# EAGLE board Qwiic_keypad-Panel (EAGLE 9.2.1)
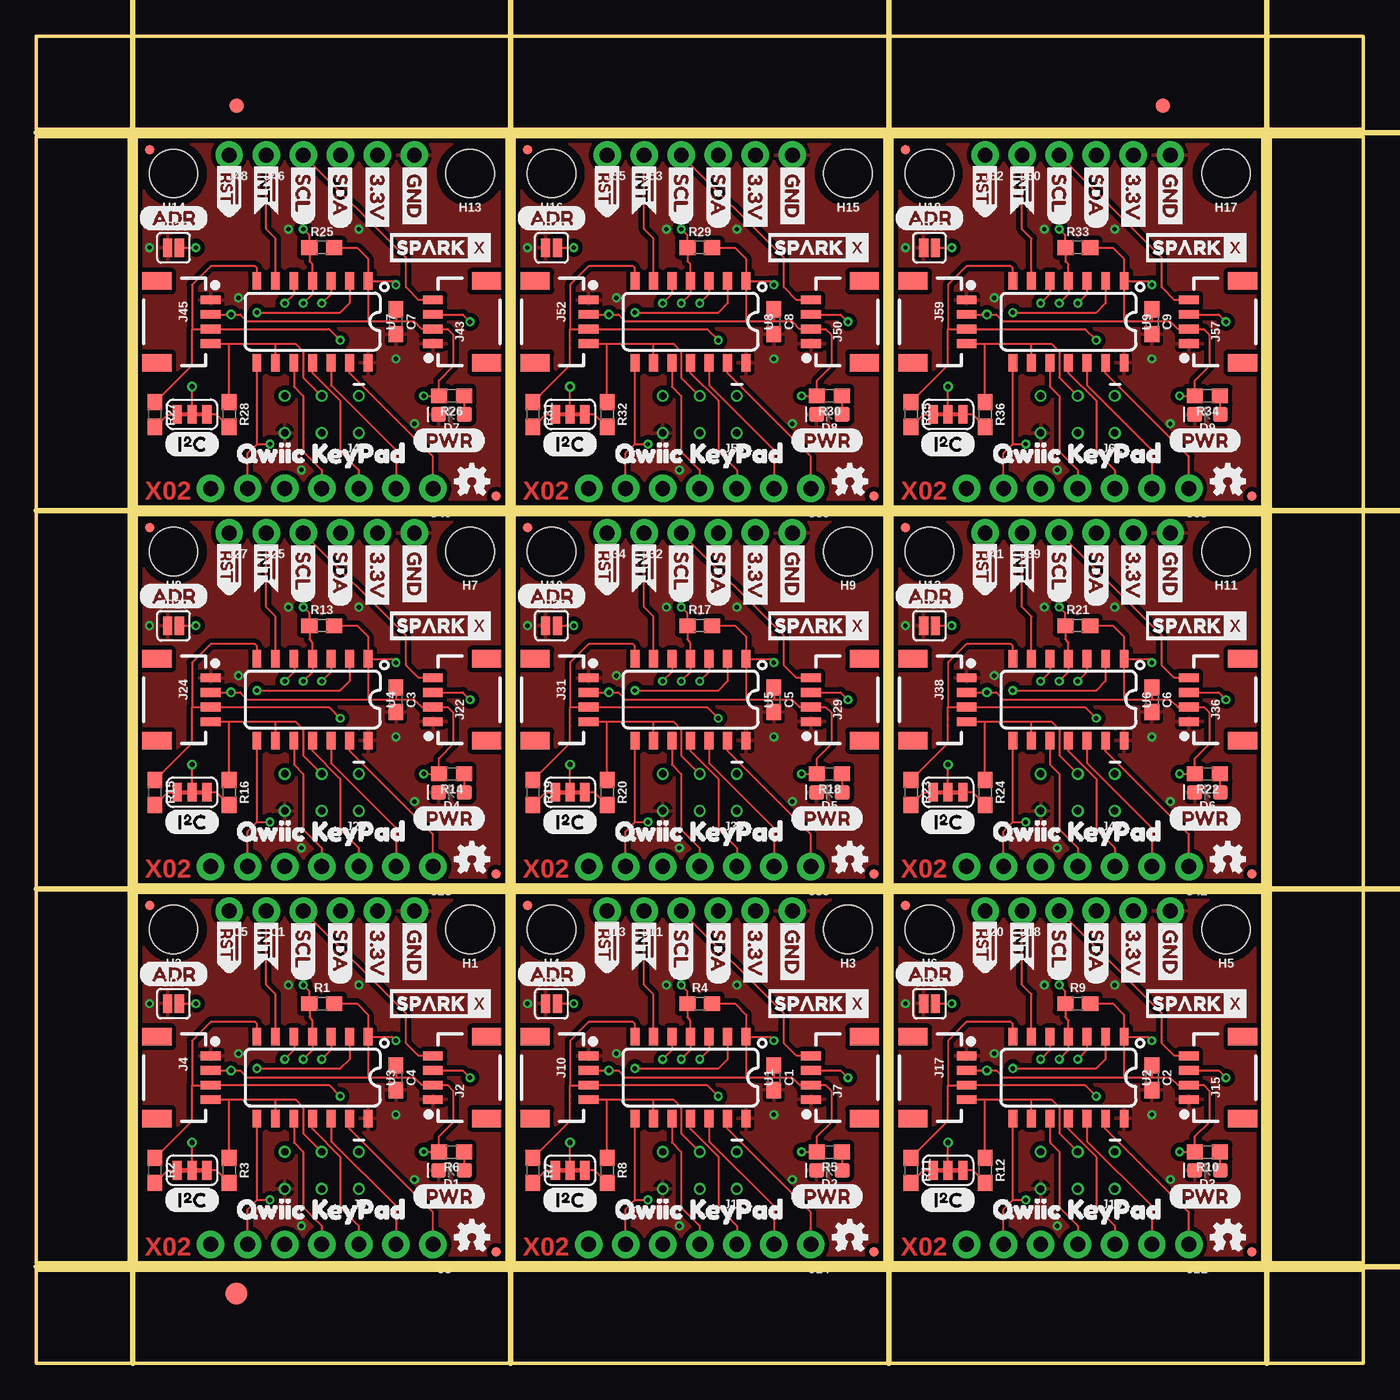
[diagram p0: board, top side]
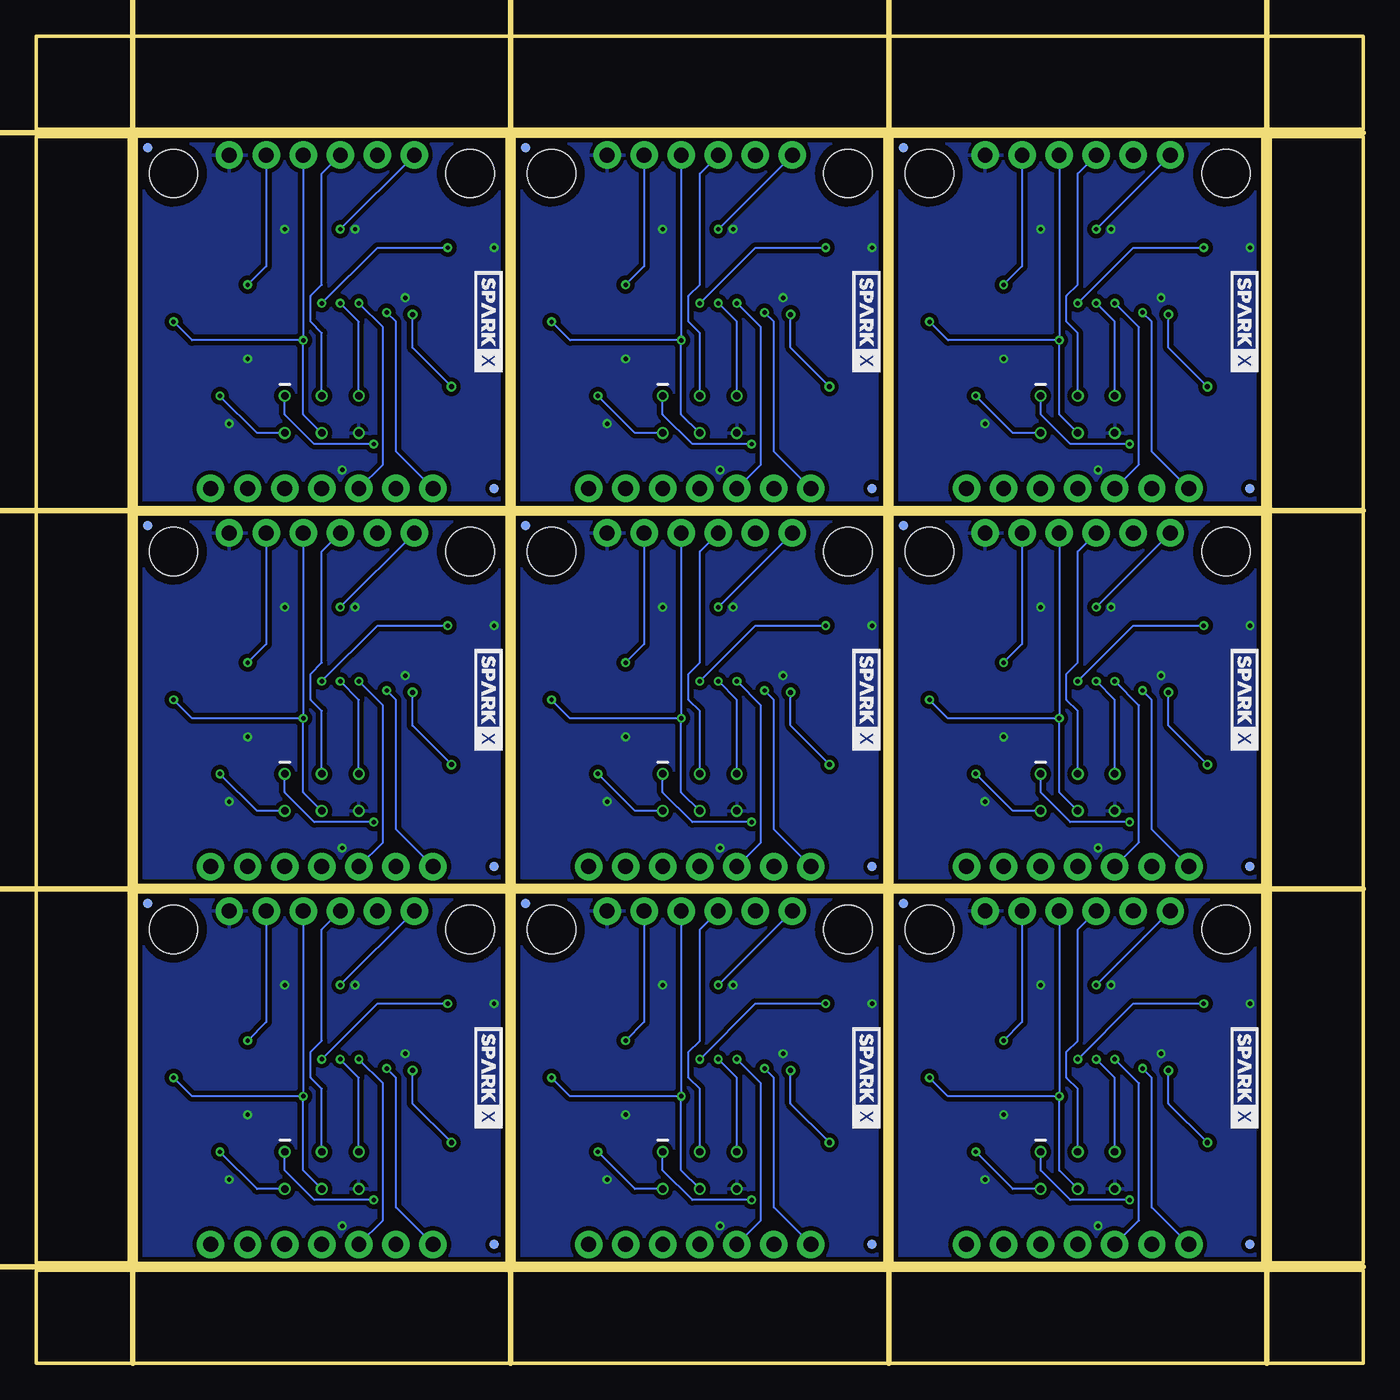
[diagram p1: board, bottom side, seen from below]

Size 90.93 x 90.93 mm. Coordinates in mm from the lower left corner, seen from the top.
Outline: 32.26,6.86 6.86,6.86 6.86,32.26 32.26,32.26 32.26,6.86
Outline: 58.17,6.86 32.77,6.86 32.77,32.26 58.17,32.26 58.17,6.86
Outline: 84.07,6.86 58.67,6.86 58.67,32.26 84.07,32.26 84.07,6.86
Outline: 32.26,32.77 6.86,32.77 6.86,58.17 32.26,58.17 32.26,32.77
Outline: 58.17,32.77 32.77,32.77 32.77,58.17 58.17,58.17 58.17,32.77
Outline: 84.07,32.77 58.67,32.77 58.67,58.17 84.07,58.17 84.07,32.77
Outline: 32.26,58.67 6.86,58.67 6.86,84.07 32.26,84.07 32.26,58.67
Outline: 58.17,58.67 32.77,58.67 32.77,84.07 58.17,84.07 58.17,58.67
Outline: 84.07,58.67 58.67,58.67 58.67,84.07 84.07,84.07 84.07,58.67
Outline: 0,6.35 90.93,6.35 90.93,0 0,0 0,6.35
Outline: 84.58,84.07 90.93,84.07 90.93,6.86 84.58,6.86 84.58,84.07
Outline: 0,90.93 90.93,90.93 90.93,84.58 0,84.58 0,90.93
Outline: 0,84.07 6.35,84.07 6.35,6.86 0,6.86 0,84.07
Copper layers (1*16): Top 0.035mm / dielectric 1.5mm / Bottom 0.035mm
Design rules "SparkFun-2-layer-PCBWay-LIMIT": minimum track width 6mil, minimum drill 0.3mm, track to track 6mil, track to pad 6mil, pad to pad 6mil, via to via 6mil, smd to smd 6mil, copper to edge 6mil, drill to drill 6mil, minimum pad ring 6mil, minimum via ring 6mil, stop-mask expansion 4mil, vias tented up to drill 25mil, thermal gap 10mil
Milling: 8 lines

## Footprints (pad centres in the part's own frame; a part is rotated, then mirrored left to right if it is on the bottom)
0603 = smd 1.1 x 1: 1 -0.85,0; 2 0.85,0
LED-0603 = smd 1 x 1: A -0.877,0; C 0.877,0
FIDUCIAL-1X2 = smd 1 x 1: 1 0,0
FIDUCIAL-1.5X3 = smd 1.5 x 1.5: 1 0,0
STAND-OFF = hole 3.302: 0,0
1X01_NO_SILK = drill 1.016 pad 1.88: 1 0,0
1X04_1MM_RA = smd 0.6 x 1.35: 1 -1.5,0; 2 -0.5,0; 3 0.5,0; 4 1.5,0 | smd 1.2 x 2: NC1 2.8,-3.675; NC2 -2.8,-3.675
1X04_NO_SILK = drill 1.016 pad 1.88: 1 0,0; 2 2.54,0; 3 5.08,0; 4 7.62,0
2X3_TEST_POINTS = drill 0.508: 1 -2.54,-1.27; 2 -2.54,1.27; 3 0,-1.27; 4 0,1.27; 5 2.54,-1.27; 6 2.54,1.27
1X07_NO_SILK = drill 1.016 pad 1.88: 1 0,0; 2 2.54,0; 3 5.08,0; 4 7.62,0; 5 10.16,0; 6 12.7,0; 7 15.24,0
MICRO-FIDUCIAL = smd 0.635 x 0.635: 1 0,0
SMT-JUMPER_2_NO_SILK = smd 0.635 x 1.27: 1 -0.406,0; 2 0.406,0
SMT-JUMPER_3_2-NC_TRACE_SILK = smd 0.635 x 1.27: 1 -1.016,0; 2 0,0; 3 1.016,0
SO14 = smd 0.6 x 1.2: 1 -3.175,-2.8; 2 -1.905,-2.8; 3 -0.635,-2.8; 4 0.635,-2.8; 5 1.905,-2.8; 6 3.175,-2.8; 7 4.445,-2.8; 8 4.445,2.8; 9 3.175,2.8; 10 1.905,2.8; 11 0.635,2.8; 12 -0.635,2.8; 13 -1.905,2.8; 14 -3.175,2.8

## Placement (x,y rotation side)
C1  0.1uF  [0603]  50.55,19.56 270 top
C2  0.1uF  [0603]  76.45,19.56 270 top
C3  0.1uF  [0603]  24.64,45.47 270 top
C4  0.1uF  [0603]  24.64,19.56 270 top
C5  0.1uF  [0603]  50.55,45.47 270 top
C6  0.1uF  [0603]  76.45,45.47 270 top
C7  0.1uF  [0603]  24.64,71.37 270 top
C8  0.1uF  [0603]  50.55,71.37 270 top
C9  0.1uF  [0603]  76.45,71.37 270 top
D1  RED  [LED-0603]  28.45,13.21 180 top
D2  RED  [LED-0603]  54.36,13.21 180 top
D3  RED  [LED-0603]  80.26,13.21 180 top
D4  RED  [LED-0603]  28.45,39.12 180 top
D5  RED  [LED-0603]  54.36,39.12 180 top
D6  RED  [LED-0603]  80.26,39.12 180 top
D7  RED  [LED-0603]  28.45,65.02 180 top
D8  RED  [LED-0603]  54.36,65.02 180 top
D9  RED  [LED-0603]  80.26,65.02 180 top
E$1  [FIDUCIAL-1X2]  13.72,86.17 0 top
E$2  [FIDUCIAL-1X2]  77.22,86.17 0 top
E$3  [FIDUCIAL-1.5X3]  13.72,4.76 0 top
H1  STAND-OFF  [STAND-OFF]  29.72,29.72 180 top
H2  STAND-OFF  [STAND-OFF]  9.4,29.72 180 top
H3  STAND-OFF  [STAND-OFF]  55.63,29.72 180 top
H4  STAND-OFF  [STAND-OFF]  35.31,29.72 180 top
H5  STAND-OFF  [STAND-OFF]  81.53,29.72 180 top
H6  STAND-OFF  [STAND-OFF]  61.21,29.72 180 top
H7  STAND-OFF  [STAND-OFF]  29.72,55.63 180 top
H8  STAND-OFF  [STAND-OFF]  9.4,55.63 180 top
H9  STAND-OFF  [STAND-OFF]  55.63,55.63 180 top
H10  STAND-OFF  [STAND-OFF]  35.31,55.63 180 top
H11  STAND-OFF  [STAND-OFF]  81.53,55.63 180 top
H12  STAND-OFF  [STAND-OFF]  61.21,55.63 180 top
H13  STAND-OFF  [STAND-OFF]  29.72,81.53 180 top
H14  STAND-OFF  [STAND-OFF]  9.4,81.53 180 top
H15  STAND-OFF  [STAND-OFF]  55.63,81.53 180 top
H16  STAND-OFF  [STAND-OFF]  35.31,81.53 180 top
H17  STAND-OFF  [STAND-OFF]  81.53,81.53 180 top
H18  STAND-OFF  [STAND-OFF]  61.21,81.53 180 top
J1  [1X01_NO_SILK]  15.75,30.99 180 top
J2  [1X04_1MM_RA]  27.18,19.56 90 top
J3  PTH  [1X04_NO_SILK]  25.91,30.99 180 top
J4  [1X04_1MM_RA]  11.94,19.56 270 top
J5  [1X01_NO_SILK]  13.21,30.99 180 top
J6  AVR_SPI_PROG_3X2TESTPOINTS  [2X3_TEST_POINTS]  19.56,13.21 180 top
J7  [1X04_1MM_RA]  53.09,19.56 90 top
J8  [1X07_NO_SILK]  27.18,8.13 180 top
J9  PTH  [1X04_NO_SILK]  51.82,30.99 180 top
J10  [1X04_1MM_RA]  37.85,19.56 270 top
J11  [1X01_NO_SILK]  41.66,30.99 180 top
J12  AVR_SPI_PROG_3X2TESTPOINTS  [2X3_TEST_POINTS]  45.47,13.21 180 top
J13  [1X01_NO_SILK]  39.12,30.99 180 top
J14  [1X07_NO_SILK]  53.09,8.13 180 top
J15  [1X04_1MM_RA]  78.99,19.56 90 top
J16  PTH  [1X04_NO_SILK]  77.72,30.99 180 top
J17  [1X04_1MM_RA]  63.75,19.56 270 top
J18  [1X01_NO_SILK]  67.56,30.99 180 top
J19  AVR_SPI_PROG_3X2TESTPOINTS  [2X3_TEST_POINTS]  71.37,13.21 180 top
J20  [1X01_NO_SILK]  65.02,30.99 180 top
J21  [1X07_NO_SILK]  78.99,8.13 180 top
J22  [1X04_1MM_RA]  27.18,45.47 90 top
J23  PTH  [1X04_NO_SILK]  25.91,56.9 180 top
J24  [1X04_1MM_RA]  11.94,45.47 270 top
J25  [1X01_NO_SILK]  15.75,56.9 180 top
J26  AVR_SPI_PROG_3X2TESTPOINTS  [2X3_TEST_POINTS]  19.56,39.12 180 top
J27  [1X01_NO_SILK]  13.21,56.9 180 top
J28  [1X07_NO_SILK]  27.18,34.04 180 top
J29  [1X04_1MM_RA]  53.09,45.47 90 top
J30  PTH  [1X04_NO_SILK]  51.82,56.9 180 top
J31  [1X04_1MM_RA]  37.85,45.47 270 top
J32  [1X01_NO_SILK]  41.66,56.9 180 top
J33  AVR_SPI_PROG_3X2TESTPOINTS  [2X3_TEST_POINTS]  45.47,39.12 180 top
J34  [1X01_NO_SILK]  39.12,56.9 180 top
J35  [1X07_NO_SILK]  53.09,34.04 180 top
J36  [1X04_1MM_RA]  78.99,45.47 90 top
J37  PTH  [1X04_NO_SILK]  77.72,56.9 180 top
J38  [1X04_1MM_RA]  63.75,45.47 270 top
J39  [1X01_NO_SILK]  67.56,56.9 180 top
J40  AVR_SPI_PROG_3X2TESTPOINTS  [2X3_TEST_POINTS]  71.37,39.12 180 top
J41  [1X01_NO_SILK]  65.02,56.9 180 top
J42  [1X07_NO_SILK]  78.99,34.04 180 top
J43  [1X04_1MM_RA]  27.18,71.37 90 top
J44  PTH  [1X04_NO_SILK]  25.91,82.8 180 top
J45  [1X04_1MM_RA]  11.94,71.37 270 top
J46  [1X01_NO_SILK]  15.75,82.8 180 top
J47  AVR_SPI_PROG_3X2TESTPOINTS  [2X3_TEST_POINTS]  19.56,65.02 180 top
J48  [1X01_NO_SILK]  13.21,82.8 180 top
J49  [1X07_NO_SILK]  27.18,59.94 180 top
J50  [1X04_1MM_RA]  53.09,71.37 90 top
J51  PTH  [1X04_NO_SILK]  51.82,82.8 180 top
J52  [1X04_1MM_RA]  37.85,71.37 270 top
J53  [1X01_NO_SILK]  41.66,82.8 180 top
J54  AVR_SPI_PROG_3X2TESTPOINTS  [2X3_TEST_POINTS]  45.47,65.02 180 top
J55  [1X01_NO_SILK]  39.12,82.8 180 top
J56  [1X07_NO_SILK]  53.09,59.94 180 top
J57  [1X04_1MM_RA]  78.99,71.37 90 top
J58  PTH  [1X04_NO_SILK]  77.72,82.8 180 top
J59  [1X04_1MM_RA]  63.75,71.37 270 top
J60  [1X01_NO_SILK]  67.56,82.8 180 top
J61  AVR_SPI_PROG_3X2TESTPOINTS  [2X3_TEST_POINTS]  71.37,65.02 180 top
J62  [1X01_NO_SILK]  65.02,82.8 180 top
J63  [1X07_NO_SILK]  78.99,59.94 180 top
JP1  FIDUCIALUFIDUCIAL  [MICRO-FIDUCIAL]  7.75,8.13 180 bottom
JP2  FIDUCIALUFIDUCIAL  [MICRO-FIDUCIAL]  7.75,31.37 180 top
JP3  FIDUCIALUFIDUCIAL  [MICRO-FIDUCIAL]  31.5,31.5 180 bottom
JP4  [SMT-JUMPER_2_NO_SILK]  9.4,24.64 0 top
JP5  FIDUCIALUFIDUCIAL  [MICRO-FIDUCIAL]  33.66,31.37 180 top
JP6  FIDUCIALUFIDUCIAL  [MICRO-FIDUCIAL]  31.5,7.62 180 top
JP7  FIDUCIALUFIDUCIAL  [MICRO-FIDUCIAL]  57.4,7.62 180 top
JP8  FIDUCIALUFIDUCIAL  [MICRO-FIDUCIAL]  33.66,8.13 180 bottom
JP9  FIDUCIALUFIDUCIAL  [MICRO-FIDUCIAL]  57.4,31.5 180 bottom
JP10  [SMT-JUMPER_2_NO_SILK]  35.31,24.64 0 top
JP11  FIDUCIALUFIDUCIAL  [MICRO-FIDUCIAL]  59.56,31.37 180 top
JP12  FIDUCIALUFIDUCIAL  [MICRO-FIDUCIAL]  83.31,7.62 180 top
JP13  FIDUCIALUFIDUCIAL  [MICRO-FIDUCIAL]  59.56,8.13 180 bottom
JP14  FIDUCIALUFIDUCIAL  [MICRO-FIDUCIAL]  83.31,31.5 180 bottom
JP15  [SMT-JUMPER_2_NO_SILK]  61.21,24.64 0 top
JP16  FIDUCIALUFIDUCIAL  [MICRO-FIDUCIAL]  7.75,57.28 180 top
JP17  FIDUCIALUFIDUCIAL  [MICRO-FIDUCIAL]  31.5,33.53 180 top
JP18  FIDUCIALUFIDUCIAL  [MICRO-FIDUCIAL]  7.75,34.04 180 bottom
JP19  FIDUCIALUFIDUCIAL  [MICRO-FIDUCIAL]  31.5,57.4 180 bottom
JP20  [SMT-JUMPER_2_NO_SILK]  9.4,50.55 0 top
JP21  FIDUCIALUFIDUCIAL  [MICRO-FIDUCIAL]  33.66,57.28 180 top
JP22  FIDUCIALUFIDUCIAL  [MICRO-FIDUCIAL]  57.4,33.53 180 top
JP23  FIDUCIALUFIDUCIAL  [MICRO-FIDUCIAL]  33.66,34.04 180 bottom
JP24  FIDUCIALUFIDUCIAL  [MICRO-FIDUCIAL]  57.4,57.4 180 bottom
JP25  [SMT-JUMPER_2_NO_SILK]  35.31,50.55 0 top
JP26  FIDUCIALUFIDUCIAL  [MICRO-FIDUCIAL]  59.56,57.28 180 top
JP27  FIDUCIALUFIDUCIAL  [MICRO-FIDUCIAL]  83.31,33.53 180 top
JP28  FIDUCIALUFIDUCIAL  [MICRO-FIDUCIAL]  59.56,34.04 180 bottom
JP29  FIDUCIALUFIDUCIAL  [MICRO-FIDUCIAL]  83.31,57.4 180 bottom
JP30  [SMT-JUMPER_2_NO_SILK]  61.21,50.55 0 top
JP31  FIDUCIALUFIDUCIAL  [MICRO-FIDUCIAL]  7.75,83.19 180 top
JP32  FIDUCIALUFIDUCIAL  [MICRO-FIDUCIAL]  31.5,59.44 180 top
JP33  FIDUCIALUFIDUCIAL  [MICRO-FIDUCIAL]  7.75,59.94 180 bottom
JP34  FIDUCIALUFIDUCIAL  [MICRO-FIDUCIAL]  31.5,83.31 180 bottom
JP35  [SMT-JUMPER_2_NO_SILK]  9.4,76.45 0 top
JP36  FIDUCIALUFIDUCIAL  [MICRO-FIDUCIAL]  33.66,83.19 180 top
JP37  FIDUCIALUFIDUCIAL  [MICRO-FIDUCIAL]  57.4,59.44 180 top
JP38  FIDUCIALUFIDUCIAL  [MICRO-FIDUCIAL]  33.66,59.94 180 bottom
JP39  FIDUCIALUFIDUCIAL  [MICRO-FIDUCIAL]  57.4,83.31 180 bottom
JP40  [SMT-JUMPER_2_NO_SILK]  35.31,76.45 0 top
JP41  FIDUCIALUFIDUCIAL  [MICRO-FIDUCIAL]  59.56,83.19 180 top
JP42  FIDUCIALUFIDUCIAL  [MICRO-FIDUCIAL]  83.31,59.44 180 top
JP43  FIDUCIALUFIDUCIAL  [MICRO-FIDUCIAL]  59.56,59.94 180 bottom
JP44  FIDUCIALUFIDUCIAL  [MICRO-FIDUCIAL]  83.31,83.31 180 bottom
JP45  [SMT-JUMPER_2_NO_SILK]  61.21,76.45 0 top
LOGO1  OSHW-LOGOMINI  [OSHW-LOGO-MINI]  29.84,8.64 0 top
LOGO2  OSHW-LOGOMINI  [OSHW-LOGO-MINI]  55.75,8.64 0 top
LOGO3  OSHW-LOGOMINI  [OSHW-LOGO-MINI]  81.66,8.64 0 top
LOGO4  OSHW-LOGOMINI  [OSHW-LOGO-MINI]  29.84,34.54 0 top
LOGO5  OSHW-LOGOMINI  [OSHW-LOGO-MINI]  55.75,34.54 0 top
LOGO6  OSHW-LOGOMINI  [OSHW-LOGO-MINI]  81.66,34.54 0 top
LOGO7  OSHW-LOGOMINI  [OSHW-LOGO-MINI]  29.84,60.45 0 top
LOGO8  OSHW-LOGOMINI  [OSHW-LOGO-MINI]  55.75,60.45 0 top
LOGO9  OSHW-LOGOMINI  [OSHW-LOGO-MINI]  81.66,60.45 0 top
R1  4.7k  [0603]  19.56,24.64 0 top
R2  2.2k  [0603]  8.13,13.21 270 top
R3  2.2k  [0603]  13.21,13.21 270 top
R4  4.7k  [0603]  45.47,24.64 0 top
R5  1k  [0603]  54.36,14.48 180 top
R6  1k  [0603]  28.45,14.48 180 top
R7  2.2k  [0603]  34.04,13.21 270 top
R8  2.2k  [0603]  39.12,13.21 270 top
R9  4.7k  [0603]  71.37,24.64 0 top
R10  1k  [0603]  80.26,14.48 180 top
R11  2.2k  [0603]  59.94,13.21 270 top
R12  2.2k  [0603]  65.02,13.21 270 top
R13  4.7k  [0603]  19.56,50.55 0 top
R14  1k  [0603]  28.45,40.39 180 top
R15  2.2k  [0603]  8.13,39.12 270 top
R16  2.2k  [0603]  13.21,39.12 270 top
R17  4.7k  [0603]  45.47,50.55 0 top
R18  1k  [0603]  54.36,40.39 180 top
R19  2.2k  [0603]  34.04,39.12 270 top
R20  2.2k  [0603]  39.12,39.12 270 top
R21  4.7k  [0603]  71.37,50.55 0 top
R22  1k  [0603]  80.26,40.39 180 top
R23  2.2k  [0603]  59.94,39.12 270 top
R24  2.2k  [0603]  65.02,39.12 270 top
R25  4.7k  [0603]  19.56,76.45 0 top
R26  1k  [0603]  28.45,66.29 180 top
R27  2.2k  [0603]  8.13,65.02 270 top
R28  2.2k  [0603]  13.21,65.02 270 top
R29  4.7k  [0603]  45.47,76.45 0 top
R30  1k  [0603]  54.36,66.29 180 top
R31  2.2k  [0603]  34.04,65.02 270 top
R32  2.2k  [0603]  39.12,65.02 270 top
R33  4.7k  [0603]  71.37,76.45 0 top
R34  1k  [0603]  80.26,66.29 180 top
R35  2.2k  [0603]  59.94,65.02 270 top
R36  2.2k  [0603]  65.02,65.02 270 top
SJ1  [SMT-JUMPER_3_2-NC_TRACE_SILK]  36.58,13.21 180 top
SJ2  [SMT-JUMPER_3_2-NC_TRACE_SILK]  62.48,13.21 180 top
SJ3  [SMT-JUMPER_3_2-NC_TRACE_SILK]  10.67,39.12 180 top
SJ4  [SMT-JUMPER_3_2-NC_TRACE_SILK]  36.58,39.12 180 top
SJ5  [SMT-JUMPER_3_2-NC_TRACE_SILK]  10.67,13.21 180 top
SJ6  [SMT-JUMPER_3_2-NC_TRACE_SILK]  62.48,39.12 180 top
SJ7  [SMT-JUMPER_3_2-NC_TRACE_SILK]  10.67,65.02 180 top
SJ8  [SMT-JUMPER_3_2-NC_TRACE_SILK]  36.58,65.02 180 top
SJ9  [SMT-JUMPER_3_2-NC_TRACE_SILK]  62.48,65.02 180 top
U1  ATTINY84  [SO14]  45.47,19.56 180 top
U2  ATTINY84  [SO14]  71.37,19.56 180 top
U3  ATTINY84  [SO14]  19.56,19.56 180 top
U4  ATTINY84  [SO14]  19.56,45.47 180 top
U5  ATTINY84  [SO14]  45.47,45.47 180 top
U6  ATTINY84  [SO14]  71.37,45.47 180 top
U7  ATTINY84  [SO14]  19.56,71.37 180 top
U8  ATTINY84  [SO14]  45.47,71.37 180 top
U9  ATTINY84  [SO14]  71.37,71.37 180 top
U$1  SPARKX-LOGO3  [SPARKX-SMALL]  8.13,19.56 270 bottom
U$2  SPARKX-LOGO3  [SPARKX-SMALL]  27.69,24.64 0 top
U$3  [3.3V]  23.37,30.61 270 top
U$4  [GND]  25.91,30.61 270 top
U$5  [SDA]  20.83,30.61 270 top
U$6  [SCL]  18.29,30.61 270 top
U$7  SPARKX-LOGO3  [SPARKX-SMALL]  53.59,24.64 0 top
U$8  [(PWR)]  25.78,11.43 0 top
U$9  [(I_SUPER2_C)]  8.76,11.18 0 top
U$10  [(ADR)]  6.98,26.67 0 top
U$11  [#RST>]  13.21,30.86 270 top
U$12  [#INT1]  15.75,30.86 270 top
U$13  SPARKX-LOGO3  [SPARKX-SMALL]  34.04,19.56 270 bottom
U$14  [3.3V]  49.28,30.61 270 top
U$15  [QWIIC_KEYPAD0]  12.57,10.54 0 top
U$16  [GND]  51.82,30.61 270 top
U$17  [SDA]  46.74,30.61 270 top
U$18  [SCL]  44.2,30.61 270 top
U$19  [(PWR)]  51.69,11.43 0 top
U$20  [(I_SUPER2_C)]  34.67,11.18 0 top
U$21  [(ADR)]  32.89,26.67 0 top
U$22  [#RST>]  39.12,30.86 270 top
U$23  [QWIIC_KEYPAD0]  38.48,10.54 0 top
U$24  [#INT1]  41.66,30.86 270 top
U$25  SPARKX-LOGO3  [SPARKX-SMALL]  79.5,24.64 0 top
U$26  SPARKX-LOGO3  [SPARKX-SMALL]  59.94,19.56 270 bottom
U$27  [3.3V]  75.18,30.61 270 top
U$28  [GND]  77.72,30.61 270 top
U$29  [SDA]  72.64,30.61 270 top
U$30  [SCL]  70.1,30.61 270 top
U$31  [(PWR)]  77.6,11.43 0 top
U$32  [(I_SUPER2_C)]  60.58,11.18 0 top
U$33  [(ADR)]  58.8,26.67 0 top
U$34  [#RST>]  65.02,30.86 270 top
U$35  [QWIIC_KEYPAD0]  64.39,10.54 0 top
U$36  [#INT1]  67.56,30.86 270 top
U$37  SPARKX-LOGO3  [SPARKX-SMALL]  27.69,50.55 0 top
U$38  SPARKX-LOGO3  [SPARKX-SMALL]  8.13,45.47 270 bottom
U$39  [3.3V]  23.37,56.51 270 top
U$40  [GND]  25.91,56.51 270 top
U$41  [SDA]  20.83,56.51 270 top
U$42  [SCL]  18.29,56.51 270 top
U$43  [(PWR)]  25.78,37.34 0 top
U$44  [(I_SUPER2_C)]  8.76,37.08 0 top
U$45  [(ADR)]  6.98,52.58 0 top
U$46  [#RST>]  13.21,56.77 270 top
U$47  [QWIIC_KEYPAD0]  12.57,36.45 0 top
U$48  [#INT1]  15.75,56.77 270 top
U$49  SPARKX-LOGO3  [SPARKX-SMALL]  53.59,50.55 0 top
U$50  SPARKX-LOGO3  [SPARKX-SMALL]  34.04,45.47 270 bottom
U$51  [3.3V]  49.28,56.51 270 top
U$52  [GND]  51.82,56.51 270 top
U$53  [SDA]  46.74,56.51 270 top
U$54  [SCL]  44.2,56.51 270 top
U$55  [(PWR)]  51.69,37.34 0 top
U$56  [(I_SUPER2_C)]  34.67,37.08 0 top
U$57  [(ADR)]  32.89,52.58 0 top
U$58  [#RST>]  39.12,56.77 270 top
U$59  [QWIIC_KEYPAD0]  38.48,36.45 0 top
U$60  [#INT1]  41.66,56.77 270 top
U$61  SPARKX-LOGO3  [SPARKX-SMALL]  79.5,50.55 0 top
U$62  SPARKX-LOGO3  [SPARKX-SMALL]  59.94,45.47 270 bottom
U$63  [3.3V]  75.18,56.51 270 top
U$64  [GND]  77.72,56.51 270 top
U$65  [SDA]  72.64,56.51 270 top
U$66  [SCL]  70.1,56.51 270 top
U$67  [(PWR)]  77.6,37.34 0 top
U$68  [(I_SUPER2_C)]  60.58,37.08 0 top
U$69  [(ADR)]  58.8,52.58 0 top
U$70  [#RST>]  65.02,56.77 270 top
U$71  [QWIIC_KEYPAD0]  64.39,36.45 0 top
U$72  [#INT1]  67.56,56.77 270 top
U$73  SPARKX-LOGO3  [SPARKX-SMALL]  27.69,76.45 0 top
U$74  SPARKX-LOGO3  [SPARKX-SMALL]  8.13,71.37 270 bottom
U$75  [3.3V]  23.37,82.42 270 top
U$76  [GND]  25.91,82.42 270 top
U$77  [SDA]  20.83,82.42 270 top
U$78  [SCL]  18.29,82.42 270 top
U$79  [(PWR)]  25.78,63.25 0 top
U$80  [(I_SUPER2_C)]  8.76,62.99 0 top
U$81  [(ADR)]  6.98,78.49 0 top
U$82  [#RST>]  13.21,82.68 270 top
U$83  [QWIIC_KEYPAD0]  12.57,62.36 0 top
U$84  [#INT1]  15.75,82.68 270 top
U$85  SPARKX-LOGO3  [SPARKX-SMALL]  53.59,76.45 0 top
U$86  SPARKX-LOGO3  [SPARKX-SMALL]  34.04,71.37 270 bottom
U$87  [3.3V]  49.28,82.42 270 top
U$88  [GND]  51.82,82.42 270 top
U$89  [SDA]  46.74,82.42 270 top
U$90  [SCL]  44.2,82.42 270 top
U$91  [(PWR)]  51.69,63.25 0 top
U$92  [(I_SUPER2_C)]  34.67,62.99 0 top
U$93  [(ADR)]  32.89,78.49 0 top
U$94  [#RST>]  39.12,82.68 270 top
U$95  [QWIIC_KEYPAD0]  38.48,62.36 0 top
U$96  [#INT1]  41.66,82.68 270 top
U$97  SPARKX-LOGO3  [SPARKX-SMALL]  79.5,76.45 0 top
U$98  SPARKX-LOGO3  [SPARKX-SMALL]  59.94,71.37 270 bottom
U$99  [3.3V]  75.18,82.42 270 top
U$100  [GND]  77.72,82.42 270 top
U$101  [SDA]  72.64,82.42 270 top
U$102  [SCL]  70.1,82.42 270 top
U$103  [(PWR)]  77.6,63.25 0 top
U$104  [(I_SUPER2_C)]  60.58,62.99 0 top
U$105  [(ADR)]  58.8,78.49 0 top
U$106  [#RST>]  65.02,82.68 270 top
U$107  [QWIIC_KEYPAD0]  64.39,62.36 0 top
U$108  [#INT1]  67.56,82.68 270 top

## Library data of the parts
C1-C9 = SparkFun-Capacitors; PROD_ID: CAP-00810
D1-D9 = SparkFun-LED; PROD_ID: DIO-00819
E$1 E$2 LOGO1-LOGO9 = SparkFun-Aesthetics
E$3 = SparkFun-Retired
H1-H18 = SparkFun-Hardware
J1 J5 J6 J8 J11-J14 J18-J21 J25-J28 J32-J35 J39-J42 J46-J49 J53-J56 J60-J63 = SparkFun-Connectors
J2 J4 J7 J10 J15 J17 J22 J24 J29 J31 J36 J38 J43 J45 J50 J52 J57 J59 = SparkFun-Connectors; PROD_ID: CONN-13694
J3 J9 J16 J23 J30 J37 J44 J51 J58 U$1 U$2 U$7 U$13 U$25 U$26 U$37 U$38 U$49 U$50 U$61 U$62 U$73 U$74 U$85 U$86 U$97 U$98 = SparkX
JP1-JP3 JP5-JP9 JP11-JP14 JP16-JP19 JP21-JP24 JP26-JP29 JP31-JP34 JP36-JP39 JP41-JP44 = SparkFun
JP4 JP10 JP15 JP20 JP25 JP30 JP35 JP40 JP45 SJ1-SJ9 = SparkFun-Jumpers
R1 R4 R9 R13 R17 R21 R25 R29 R33 = SparkFun-Resistors; PROD_ID: RES-07857
R2 R3 R7 R8 R11 R12 R15 R16 R19 R20 R23 R24 R27 R28 R31 R32 R35 R36 = SparkFun-Resistors; PROD_ID: RES-08272
R5 R6 R10 R14 R18 R22 R26 R30 R34 = SparkFun-Resistors; PROD_ID: RES-07856
U1-U9 = SparkFun-IC-Microcontroller; PROD_ID: IC-11285
U$3-U$6 U$8-U$11 U$14 U$16-U$22 U$27-U$34 U$39-U$46 U$51-U$58 U$63-U$70 U$75-U$82 U$87-U$94 U$99-U$106 = Labels-0_04
U$12 U$24 U$36 U$48 U$60 U$72 U$84 U$96 U$108 = buzzard_labels (12)
U$15 U$23 U$35 U$47 U$59 U$71 U$83 U$95 U$107 = buzzard_labels (10)

## Nets
1: J8.1 U3.13
2: J8.2 U3.12
3: J8.3 U3.11
3.3V: C4.1 J2.2 J3.2 J4.2 J6.2 R1.2 R6.2 SJ5.2 U3.1
3.3V1: C1.1 J7.2 J9.2 J10.2 J12.2 R4.2 R5.2 SJ1.2 U1.1
3.3V2: C2.1 J15.2 J16.2 J17.2 J19.2 R9.2 R10.2 SJ2.2 U2.1
3.3V3: C3.1 J22.2 J23.2 J24.2 J26.2 R13.2 R14.2 SJ3.2 U4.1
3.3V4: C5.1 J29.2 J30.2 J31.2 J33.2 R17.2 R18.2 SJ4.2 U5.1
3.3V5: C6.1 J36.2 J37.2 J38.2 J40.2 R21.2 R22.2 SJ6.2 U6.1
3.3V6: C7.1 J43.2 J44.2 J45.2 J47.2 R25.2 R26.2 SJ7.2 U7.1
3.3V7: C8.1 J50.2 J51.2 J52.2 J54.2 R29.2 R30.2 SJ8.2 U8.1
3.3V8: C9.1 J57.2 J58.2 J59.2 J61.2 R33.2 R34.2 SJ9.2 U9.1
4: J8.4 U3.10
5: J8.5 U3.5
6: J14.4 U1.10
7: J8.7 U3.2
8: J14.3 U1.11
9: J14.2 U1.12
10: J14.1 U1.13
11: J14.7 U1.2
12: J14.5 U1.5
13: J21.4 U2.10
14: J21.3 U2.11
15: J21.2 U2.12
16: J21.1 U2.13
17: J21.7 U2.2
18: J21.5 U2.5
19: J28.4 U4.10
20: J28.3 U4.11
21: J28.2 U4.12
22: J28.1 U4.13
23: J28.7 U4.2
24: J28.5 U4.5
25: J35.4 U5.10
26: J35.3 U5.11
27: J35.2 U5.12
28: J35.1 U5.13
29: J35.7 U5.2
30: J35.5 U5.5
31: J42.4 U6.10
32: J42.3 U6.11
33: J42.2 U6.12
34: J42.1 U6.13
35: J42.7 U6.2
36: J42.5 U6.5
37: J49.4 U7.10
38: J49.3 U7.11
39: J49.2 U7.12
40: J49.1 U7.13
41: J49.7 U7.2
42: J49.5 U7.5
43: J56.4 U8.10
44: J56.3 U8.11
45: J56.2 U8.12
46: J56.1 U8.13
47: J56.7 U8.2
48: J56.5 U8.5
49: J63.4 U9.10
50: J63.3 U9.11
51: J63.2 U9.12
52: J63.1 U9.13
53: J63.7 U9.2
54: J63.5 U9.5
!INT: J1.1 U3.6
!INT1: J11.1 U1.6
!INT2: J18.1 U2.6
!INT3: J25.1 U4.6
!INT4: J32.1 U5.6
!INT5: J39.1 U6.6
!INT6: J46.1 U7.6
!INT7: J53.1 U8.6
!INT8: J60.1 U9.6
!RST: J5.1 J6.5 R1.1 U3.4
!RST1: J12.5 J13.1 R4.1 U1.4
!RST2: J19.5 J20.1 R9.1 U2.4
!RST3: J26.5 J27.1 R13.1 U4.4
!RST4: J33.5 J34.1 R17.1 U5.4
!RST5: J40.5 J41.1 R21.1 U6.4
!RST6: J47.5 J48.1 R25.1 U7.4
!RST7: J54.5 J55.1 R29.1 U8.4
!RST8: J61.5 J62.1 R33.1 U9.4
ADD1: JP4.2 U3.3
ADD2: JP10.2 U1.3
ADD3: JP15.2 U2.3
ADD4: JP20.2 U4.3
ADD5: JP25.2 U5.3
ADD6: JP30.2 U6.3
ADD7: JP35.2 U7.3
ADD8: JP40.2 U8.3
ADD9: JP45.2 U9.3
GND: C4.2 D1.C J2.1 J3.1 J4.1 J6.6 JP4.1 U3.14
GND1: C1.2 D2.C J7.1 J9.1 J10.1 J12.6 JP10.1 U1.14
GND2: C2.2 D3.C J15.1 J16.1 J17.1 J19.6 JP15.1 U2.14
GND3: C3.2 D4.C J22.1 J23.1 J24.1 J26.6 JP20.1 U4.14
GND4: C5.2 D5.C J29.1 J30.1 J31.1 J33.6 JP25.1 U5.14
GND5: C6.2 D6.C J36.1 J37.1 J38.1 J40.6 JP30.1 U6.14
GND6: C7.2 D7.C J43.1 J44.1 J45.1 J47.6 JP35.1 U7.14
GND7: C8.2 D8.C J50.1 J51.1 J52.1 J54.6 JP40.1 U8.14
GND8: C9.2 D9.C J57.1 J58.1 J59.1 J61.6 JP45.1 U9.14
MISO/1: J12.1 J14.6 U1.8
MISO/2: J19.1 J21.6 U2.8
MISO/3: J26.1 J28.6 U4.8
MISO/4: J33.1 J35.6 U5.8
MISO/5: J40.1 J42.6 U6.8
MISO/6: J6.1 J8.6 U3.8
MISO/7: J47.1 J49.6 U7.8
MISO/8: J54.1 J56.6 U8.8
MISO/9: J61.1 J63.6 U9.8
N$1: D1.A R6.1
N$2: R2.2 SJ5.3
N$3: R3.2 SJ5.1
N$4: D2.A R5.1
N$5: R7.2 SJ1.3
N$6: R8.2 SJ1.1
N$7: D3.A R10.1
N$8: R11.2 SJ2.3
N$9: R12.2 SJ2.1
N$10: D4.A R14.1
N$11: R15.2 SJ3.3
N$12: R16.2 SJ3.1
N$13: D5.A R18.1
N$14: R19.2 SJ4.3
N$15: R20.2 SJ4.1
N$16: D6.A R22.1
N$17: R23.2 SJ6.3
N$18: R24.2 SJ6.1
N$19: D7.A R26.1
N$20: R27.2 SJ7.3
N$21: R28.2 SJ7.1
N$22: D8.A R30.1
N$23: R31.2 SJ8.3
N$24: R32.2 SJ8.1
N$25: D9.A R34.1
N$26: R35.2 SJ9.3
N$27: R36.2 SJ9.1
SCL: J2.4 J3.4 J4.4 J6.3 R3.1 U3.9
SCL1: J7.4 J9.4 J10.4 J12.3 R8.1 U1.9
SCL2: J15.4 J16.4 J17.4 J19.3 R12.1 U2.9
SCL3: J22.4 J23.4 J24.4 J26.3 R16.1 U4.9
SCL4: J29.4 J30.4 J31.4 J33.3 R20.1 U5.9
SCL5: J36.4 J37.4 J38.4 J40.3 R24.1 U6.9
SCL6: J43.4 J44.4 J45.4 J47.3 R28.1 U7.9
SCL7: J50.4 J51.4 J52.4 J54.3 R32.1 U8.9
SCL8: J57.4 J58.4 J59.4 J61.3 R36.1 U9.9
SDA: J2.3 J3.3 J4.3 J6.4 R2.1 U3.7
SDA1: J7.3 J9.3 J10.3 J12.4 R7.1 U1.7
SDA2: J15.3 J16.3 J17.3 J19.4 R11.1 U2.7
SDA3: J22.3 J23.3 J24.3 J26.4 R15.1 U4.7
SDA4: J29.3 J30.3 J31.3 J33.4 R19.1 U5.7
SDA5: J36.3 J37.3 J38.3 J40.4 R23.1 U6.7
SDA6: J43.3 J44.3 J45.3 J47.4 R27.1 U7.7
SDA7: J50.3 J51.3 J52.3 J54.4 R31.1 U8.7
SDA8: J57.3 J58.3 J59.3 J61.4 R35.1 U9.7

## Tracks (layer width: path | path; a pad name or v marks a point on that pad's centre or on a via)
1
  Top 0.152: U3.13 21.46,16.05 27.18,10.33 J8.1
2
  Top 0.152: U3.12 20.19,15.21 24.64,10.76 J8.2
3
  Top 0.152: J8.3 22.1,9.4 20.83,10.67 20.83,14.14 18.92,16.05 U3.11
3.3V  (via drill 0.3, 0.35)
  Top 0.152: 24.64,19.56 25.91,19.56 26.41,19.06 J2.2 28.19,19.06 28.57,18.67 28.57,16.51 27.6,15.53 R6.2 v26.54,14.48 | 24.64,19.56 22.73,19.56 | 22.73,19.56 14.48,19.56 13.98,20.06 v13.34,20.06 J4.2 | C4.1 24.64,19.56 | U3.1 22.73,19.56 | R1.2 21.97,24.64 22.73,23.88 U3.1 | U3.1 24.38,22.36 v24.64,22.1 | SJ5.2 v10.67,15.11
  Bottom 0.152: J6.2 24,11.94 v26.54,14.48 | J3.2 23.37,23.37 v24.64,22.1 | v10.67,15.11 13.34,17.78 v13.34,20.06
3.3V1  (via drill 0.3, 0.35)
  Top 0.152: 50.55,19.56 51.82,19.56 52.32,19.06 J7.2 54.09,19.06 54.48,18.67 54.48,16.51 53.51,15.53 R5.2 v52.45,14.48 | 50.55,19.56 48.64,19.56 | 48.64,19.56 40.39,19.56 39.89,20.06 v39.24,20.06 J10.2 | C1.1 50.55,19.56 | U1.1 48.64,19.56 | R4.2 47.88,24.64 48.64,23.88 U1.1 | U1.1 50.29,22.36 v50.55,22.1 | SJ1.2 v36.58,15.11
  Bottom 0.152: J12.2 49.91,11.94 v52.45,14.48 | J9.2 49.28,23.37 v50.55,22.1 | v36.58,15.11 39.24,17.78 v39.24,20.06
3.3V2  (via drill 0.3, 0.35)
  Top 0.152: 76.45,19.56 77.72,19.56 78.22,19.06 J15.2 80,19.06 80.39,18.67 80.39,16.51 79.41,15.53 R10.2 v78.36,14.48 | 76.45,19.56 74.55,19.56 | 74.55,19.56 66.29,19.56 65.79,20.06 v65.15,20.06 J17.2 | C2.1 76.45,19.56 | U2.1 74.55,19.56 | R9.2 73.79,24.64 74.55,23.88 U2.1 | U2.1 76.19,22.36 v76.45,22.1 | SJ2.2 v62.48,15.11
  Bottom 0.152: J19.2 75.82,11.94 v78.36,14.48 | J16.2 75.18,23.37 v76.45,22.1 | v62.48,15.11 65.15,17.78 v65.15,20.06
3.3V3  (via drill 0.3, 0.35)
  Top 0.152: 24.64,45.47 25.91,45.47 26.41,44.97 J22.2 28.19,44.97 28.57,44.58 28.57,42.42 27.6,41.44 R14.2 v26.54,40.39 | 24.64,45.47 22.73,45.47 | 22.73,45.47 14.48,45.47 13.98,45.97 v13.34,45.97 J24.2 | C3.1 24.64,45.47 | U4.1 22.73,45.47 | R13.2 21.97,50.55 22.73,49.78 U4.1 | U4.1 24.38,48.27 v24.64,48.01 | SJ3.2 v10.67,41.02
  Bottom 0.152: J26.2 24,37.85 v26.54,40.39 | J23.2 23.37,49.28 v24.64,48.01 | v10.67,41.02 13.34,43.69 v13.34,45.97
3.3V4  (via drill 0.3, 0.35)
  Top 0.152: 50.55,45.47 51.82,45.47 52.32,44.97 J29.2 54.09,44.97 54.48,44.58 54.48,42.42 53.51,41.44 R18.2 v52.45,40.39 | 50.55,45.47 48.64,45.47 | 48.64,45.47 40.39,45.47 39.89,45.97 v39.24,45.97 J31.2 | C5.1 50.55,45.47 | U5.1 48.64,45.47 | R17.2 47.88,50.55 48.64,49.78 U5.1 | U5.1 50.29,48.27 v50.55,48.01 | SJ4.2 v36.58,41.02
  Bottom 0.152: J33.2 49.91,37.85 v52.45,40.39 | J30.2 49.28,49.28 v50.55,48.01 | v36.58,41.02 39.24,43.69 v39.24,45.97
3.3V5  (via drill 0.3, 0.35)
  Top 0.152: 76.45,45.47 77.72,45.47 78.22,44.97 J36.2 80,44.97 80.39,44.58 80.39,42.42 79.41,41.44 R22.2 v78.36,40.39 | 76.45,45.47 74.55,45.47 | 74.55,45.47 66.29,45.47 65.79,45.97 v65.15,45.97 J38.2 | C6.1 76.45,45.47 | U6.1 74.55,45.47 | R21.2 73.79,50.55 74.55,49.78 U6.1 | U6.1 76.19,48.27 v76.45,48.01 | SJ6.2 v62.48,41.02
  Bottom 0.152: J40.2 75.82,37.85 v78.36,40.39 | J37.2 75.18,49.28 v76.45,48.01 | v62.48,41.02 65.15,43.69 v65.15,45.97
3.3V6  (via drill 0.3, 0.35)
  Top 0.152: 24.64,71.37 25.91,71.37 26.41,70.87 J43.2 28.19,70.87 28.57,70.48 28.57,68.33 27.6,67.35 R26.2 v26.54,66.29 | 24.64,71.37 22.73,71.37 | 22.73,71.37 14.48,71.37 13.98,71.87 v13.34,71.87 J45.2 | C7.1 24.64,71.37 | U7.1 22.73,71.37 | R25.2 21.97,76.45 22.73,75.69 U7.1 | U7.1 24.38,74.17 v24.64,73.91 | SJ7.2 v10.67,66.93
  Bottom 0.152: J47.2 24,63.75 v26.54,66.29 | J44.2 23.37,75.18 v24.64,73.91 | v10.67,66.93 13.34,69.6 v13.34,71.87
3.3V7  (via drill 0.3, 0.35)
  Top 0.152: 50.55,71.37 51.82,71.37 52.32,70.87 J50.2 54.09,70.87 54.48,70.48 54.48,68.33 53.51,67.35 R30.2 v52.45,66.29 | 50.55,71.37 48.64,71.37 | 48.64,71.37 40.39,71.37 39.89,71.87 v39.24,71.87 J52.2 | C8.1 50.55,71.37 | U8.1 48.64,71.37 | R29.2 47.88,76.45 48.64,75.69 U8.1 | U8.1 50.29,74.17 v50.55,73.91 | SJ8.2 v36.58,66.93
  Bottom 0.152: J54.2 49.91,63.75 v52.45,66.29 | J51.2 49.28,75.18 v50.55,73.91 | v36.58,66.93 39.24,69.6 v39.24,71.87
3.3V8  (via drill 0.3, 0.35)
  Top 0.152: 76.45,71.37 77.72,71.37 78.22,70.87 J57.2 80,70.87 80.39,70.48 80.39,68.33 79.41,67.35 R34.2 v78.36,66.29 | 76.45,71.37 74.55,71.37 | 74.55,71.37 66.29,71.37 65.79,71.87 v65.15,71.87 J59.2 | C9.1 76.45,71.37 | U9.1 74.55,71.37 | R33.2 73.79,76.45 74.55,75.69 U9.1 | U9.1 76.19,74.17 v76.45,73.91 | SJ9.2 v62.48,66.93
  Bottom 0.152: J61.2 75.82,63.75 v78.36,66.29 | J58.2 75.18,75.18 v76.45,73.91 | v62.48,66.93 65.15,69.6 v65.15,71.87
4
  Top 0.152: J8.4 19.56,9.4 18.29,10.67 18.29,14.48 17.65,15.11 U3.10
5  (via drill 0.3)
  Top 0.152: U3.5 17.65,21.46 v17.02,20.83
  Bottom 0.152: v17.02,20.83 15.37,19.18 15.37,9.78 J8.5
6
  Top 0.152: J14.4 45.47,9.4 44.2,10.67 44.2,14.48 43.56,15.11 U1.10
7  (via drill 0.3)
  Top 0.152: v15.11,20.19 20.83,20.19 21.46,20.83 U3.2
  Bottom 0.152: J8.7 14.48,10.67 14.48,19.56 v15.11,20.19
8
  Top 0.152: J14.3 48.01,9.4 46.74,10.67 46.74,14.14 44.83,16.05 U1.11
9
  Top 0.152: U1.12 46.1,15.21 50.55,10.76 J14.2
10
  Top 0.152: U1.13 47.37,16.05 53.09,10.33 J14.1
11  (via drill 0.3)
  Top 0.152: v41.02,20.19 46.74,20.19 47.37,20.83 U1.2
  Bottom 0.152: J14.7 40.39,10.67 40.39,19.56 v41.02,20.19
12  (via drill 0.3)
  Top 0.152: U1.5 43.56,21.46 v42.93,20.83
  Bottom 0.152: v42.93,20.83 41.27,19.18 41.27,9.78 J14.5
13
  Top 0.152: J21.4 71.37,9.4 70.1,10.67 70.1,14.48 69.47,15.11 U2.10
14
  Top 0.152: J21.3 73.91,9.4 72.64,10.67 72.64,14.14 70.74,16.05 U2.11
15
  Top 0.152: U2.12 72.01,15.21 76.45,10.76 J21.2
16
  Top 0.152: U2.13 73.28,16.05 78.99,10.33 J21.1
17  (via drill 0.3)
  Top 0.152: v66.93,20.19 72.64,20.19 73.28,20.83 U2.2
  Bottom 0.152: J21.7 66.29,10.67 66.29,19.56 v66.93,20.19
18  (via drill 0.3)
  Top 0.152: U2.5 69.47,21.46 v68.83,20.83
  Bottom 0.152: v68.83,20.83 67.18,19.18 67.18,9.78 J21.5
19
  Top 0.152: J28.4 19.56,35.31 18.29,36.58 18.29,40.39 17.65,41.02 U4.10
20
  Top 0.152: J28.3 22.1,35.31 20.83,36.58 20.83,40.05 18.92,41.95 U4.11
21
  Top 0.152: U4.12 20.19,41.12 24.64,36.67 J28.2
22
  Top 0.152: U4.13 21.46,41.95 27.18,36.24 J28.1
23  (via drill 0.3)
  Top 0.152: v15.11,46.1 20.83,46.1 21.46,46.74 U4.2
  Bottom 0.152: J28.7 14.48,36.58 14.48,45.47 v15.11,46.1
24  (via drill 0.3)
  Top 0.152: U4.5 17.65,47.37 v17.02,46.74
  Bottom 0.152: v17.02,46.74 15.37,45.08 15.37,35.69 J28.5
25
  Top 0.152: J35.4 45.47,35.31 44.2,36.58 44.2,40.39 43.56,41.02 U5.10
26
  Top 0.152: J35.3 48.01,35.31 46.74,36.58 46.74,40.05 44.83,41.95 U5.11
27
  Top 0.152: U5.12 46.1,41.12 50.55,36.67 J35.2
28
  Top 0.152: U5.13 47.37,41.95 53.09,36.24 J35.1
29  (via drill 0.3)
  Top 0.152: v41.02,46.1 46.74,46.1 47.37,46.74 U5.2
  Bottom 0.152: J35.7 40.39,36.58 40.39,45.47 v41.02,46.1
30  (via drill 0.3)
  Top 0.152: U5.5 43.56,47.37 v42.93,46.74
  Bottom 0.152: v42.93,46.74 41.27,45.08 41.27,35.69 J35.5
31
  Top 0.152: J42.4 71.37,35.31 70.1,36.58 70.1,40.39 69.47,41.02 U6.10
32
  Top 0.152: J42.3 73.91,35.31 72.64,36.58 72.64,40.05 70.74,41.95 U6.11
33
  Top 0.152: U6.12 72.01,41.12 76.45,36.67 J42.2
34
  Top 0.152: U6.13 73.28,41.95 78.99,36.24 J42.1
35  (via drill 0.3)
  Top 0.152: v66.93,46.1 72.64,46.1 73.28,46.74 U6.2
  Bottom 0.152: J42.7 66.29,36.58 66.29,45.47 v66.93,46.1
36  (via drill 0.3)
  Top 0.152: U6.5 69.47,47.37 v68.83,46.74
  Bottom 0.152: v68.83,46.74 67.18,45.08 67.18,35.69 J42.5
37
  Top 0.152: J49.4 19.56,61.21 18.29,62.48 18.29,66.29 17.65,66.93 U7.10
38
  Top 0.152: J49.3 22.1,61.21 20.83,62.48 20.83,65.96 18.92,67.86 U7.11
39
  Top 0.152: U7.12 20.19,67.02 24.64,62.58 J49.2
40
  Top 0.152: U7.13 21.46,67.86 27.18,62.15 J49.1
41  (via drill 0.3)
  Top 0.152: v15.11,72.01 20.83,72.01 21.46,72.64 U7.2
  Bottom 0.152: J49.7 14.48,62.48 14.48,71.37 v15.11,72.01
42  (via drill 0.3)
  Top 0.152: U7.5 17.65,73.28 v17.02,72.64
  Bottom 0.152: v17.02,72.64 15.37,70.99 15.37,61.59 J49.5
43
  Top 0.152: J56.4 45.47,61.21 44.2,62.48 44.2,66.29 43.56,66.93 U8.10
44
  Top 0.152: J56.3 48.01,61.21 46.74,62.48 46.74,65.96 44.83,67.86 U8.11
45
  Top 0.152: U8.12 46.1,67.02 50.55,62.58 J56.2
46
  Top 0.152: U8.13 47.37,67.86 53.09,62.15 J56.1
47  (via drill 0.3)
  Top 0.152: v41.02,72.01 46.74,72.01 47.37,72.64 U8.2
  Bottom 0.152: J56.7 40.39,62.48 40.39,71.37 v41.02,72.01
48  (via drill 0.3)
  Top 0.152: U8.5 43.56,73.28 v42.93,72.64
  Bottom 0.152: v42.93,72.64 41.27,70.99 41.27,61.59 J56.5
49
  Top 0.152: J63.4 71.37,61.21 70.1,62.48 70.1,66.29 69.47,66.93 U9.10
50
  Top 0.152: J63.3 73.91,61.21 72.64,62.48 72.64,65.96 70.74,67.86 U9.11
51
  Top 0.152: U9.12 72.01,67.02 76.45,62.58 J63.2
52
  Top 0.152: U9.13 73.28,67.86 78.99,62.15 J63.1
53  (via drill 0.3)
  Top 0.152: v66.93,72.01 72.64,72.01 73.28,72.64 U9.2
  Bottom 0.152: J63.7 66.29,62.48 66.29,71.37 v66.93,72.01
54  (via drill 0.3)
  Top 0.152: U9.5 69.47,73.28 v68.83,72.64
  Bottom 0.152: v68.83,72.64 67.18,70.99 67.18,61.59 J63.5
!INT
  Top 0.152: U3.6 16.38,25.27 15.75,25.91 J1.1
!INT1
  Top 0.152: U1.6 42.29,25.27 41.66,25.91 J11.1
!INT2
  Top 0.152: U2.6 68.2,25.27 67.56,25.91 J18.1
!INT3
  Top 0.152: U4.6 16.38,51.18 15.75,51.82 J25.1
!INT4
  Top 0.152: U5.6 42.29,51.18 41.66,51.82 J32.1
!INT5
  Top 0.152: U6.6 68.2,51.18 67.56,51.82 J39.1
!INT6
  Top 0.152: U7.6 16.38,77.09 15.75,77.72 J46.1
!INT7
  Top 0.152: U8.6 42.29,77.09 41.66,77.72 J53.1
!INT8
  Top 0.152: U9.6 68.2,77.09 67.56,77.72 J60.1
!RST  (via drill 0.3)
  Top 0.152: v18.29,25.91 18.71,25.49 R1.1 18.71,23.71 18.92,23.5 U3.4 18.92,21.46 v18.29,20.83
  Bottom 0.152: J5.1 v18.29,25.91 | J6.5 17.02,19.56 v18.29,20.83
!RST1  (via drill 0.3)
  Top 0.152: v44.2,25.91 44.62,25.49 R4.1 44.62,23.71 44.83,23.5 U1.4 44.83,21.46 v44.2,20.83
  Bottom 0.152: J13.1 v44.2,25.91 | J12.5 42.93,19.56 v44.2,20.83
!RST2  (via drill 0.3)
  Top 0.152: v70.1,25.91 70.52,25.49 R9.1 70.52,23.71 70.74,23.5 U2.4 70.74,21.46 v70.1,20.83
  Bottom 0.152: J20.1 v70.1,25.91 | J19.5 68.83,19.56 v70.1,20.83
!RST3  (via drill 0.3)
  Top 0.152: v18.29,51.82 18.71,51.4 R13.1 18.71,49.62 18.92,49.4 U4.4 18.92,47.37 v18.29,46.74
  Bottom 0.152: J27.1 v18.29,51.82 | J26.5 17.02,45.47 v18.29,46.74
!RST4  (via drill 0.3)
  Top 0.152: v44.2,51.82 44.62,51.4 R17.1 44.62,49.62 44.83,49.4 U5.4 44.83,47.37 v44.2,46.74
  Bottom 0.152: J34.1 v44.2,51.82 | J33.5 42.93,45.47 v44.2,46.74
!RST5  (via drill 0.3)
  Top 0.152: v70.1,51.82 70.52,51.4 R21.1 70.52,49.62 70.74,49.4 U6.4 70.74,47.37 v70.1,46.74
  Bottom 0.152: J41.1 v70.1,51.82 | J40.5 68.83,45.47 v70.1,46.74
!RST6  (via drill 0.3)
  Top 0.152: v18.29,77.72 18.71,77.3 R25.1 18.71,75.53 18.92,75.31 U7.4 18.92,73.28 v18.29,72.64
  Bottom 0.152: J48.1 v18.29,77.72 | J47.5 17.02,71.37 v18.29,72.64
!RST7  (via drill 0.3)
  Top 0.152: v44.2,77.72 44.62,77.3 R29.1 44.62,75.53 44.83,75.31 U8.4 44.83,73.28 v44.2,72.64
  Bottom 0.152: J55.1 v44.2,77.72 | J54.5 42.93,71.37 v44.2,72.64
!RST8  (via drill 0.3)
  Top 0.152: v70.1,77.72 70.52,77.3 R33.1 70.52,75.53 70.74,75.31 U9.4 70.74,73.28 v70.1,72.64
  Bottom 0.152: J62.1 v70.1,77.72 | J61.5 68.83,71.37 v70.1,72.64
ADD1  (via drill 0.3)
  Top 0.152: JP4.2 v10.92,24.64 | U3.3 20.19,21.46 v19.56,20.83
  Bottom 0.152: v19.56,20.83 15.75,24.64 v10.92,24.64
ADD2  (via drill 0.3)
  Top 0.152: JP10.2 v36.83,24.64 | U1.3 46.1,21.46 v45.47,20.83
  Bottom 0.152: v45.47,20.83 41.66,24.64 v36.83,24.64
ADD3  (via drill 0.3)
  Top 0.152: JP15.2 v62.74,24.64 | U2.3 72.01,21.46 v71.37,20.83
  Bottom 0.152: v71.37,20.83 67.56,24.64 v62.74,24.64
ADD4  (via drill 0.3)
  Top 0.152: JP20.2 v10.92,50.55 | U4.3 20.19,47.37 v19.56,46.74
  Bottom 0.152: v19.56,46.74 15.75,50.55 v10.92,50.55
ADD5  (via drill 0.3)
  Top 0.152: JP25.2 v36.83,50.55 | U5.3 46.1,47.37 v45.47,46.74
  Bottom 0.152: v45.47,46.74 41.66,50.55 v36.83,50.55
ADD6  (via drill 0.3)
  Top 0.152: JP30.2 v62.74,50.55 | U6.3 72.01,47.37 v71.37,46.74
  Bottom 0.152: v71.37,46.74 67.56,50.55 v62.74,50.55
ADD7  (via drill 0.3)
  Top 0.152: JP35.2 v10.92,76.45 | U7.3 20.19,73.28 v19.56,72.64
  Bottom 0.152: v19.56,72.64 15.75,76.45 v10.92,76.45
ADD8  (via drill 0.3)
  Top 0.152: JP40.2 v36.83,76.45 | U8.3 46.1,73.28 v45.47,72.64
  Bottom 0.152: v45.47,72.64 41.66,76.45 v36.83,76.45
ADD9  (via drill 0.3)
  Top 0.152: JP45.2 v62.74,76.45 | U9.3 72.01,73.28 v71.37,72.64
  Bottom 0.152: v71.37,72.64 67.56,76.45 v62.74,76.45
GND  (via drill 0.3)
  other vias: 24.64,17.02 18.16,9.4 7.75,24.64 13.84,21.21 17.27,25.91 22.1,25.91 25.91,12.57
  pour Bottom (isolate 0.305): 32.26,32.26 32.26,6.86 6.86,6.86 6.86,32.26
  pour Top (isolate 0.305): 32.26,32.26 32.26,6.86 6.86,6.86 6.86,32.26
GND1  (via drill 0.3)
  other vias: 50.55,17.02 44.07,9.4 33.66,24.64 39.75,21.21 43.18,25.91 48.01,25.91 51.82,12.57
  pour Bottom (isolate 0.305): 58.17,32.26 58.17,6.86 32.77,6.86 32.77,32.26
  pour Top (isolate 0.305): 58.17,32.26 58.17,6.86 32.77,6.86 32.77,32.26
GND2  (via drill 0.3)
  other vias: 76.45,17.02 69.98,9.4 59.56,24.64 65.66,21.21 69.09,25.91 73.91,25.91 77.72,12.57
  pour Bottom (isolate 0.305): 84.07,32.26 84.07,6.86 58.67,6.86 58.67,32.26
  pour Top (isolate 0.305): 84.07,32.26 84.07,6.86 58.67,6.86 58.67,32.26
GND3  (via drill 0.3)
  other vias: 24.64,42.93 18.16,35.31 7.75,50.55 13.84,47.12 17.27,51.82 22.1,51.82 25.91,38.48
  pour Bottom (isolate 0.305): 32.26,58.17 32.26,32.77 6.86,32.77 6.86,58.17
  pour Top (isolate 0.305): 32.26,58.17 32.26,32.77 6.86,32.77 6.86,58.17
GND4  (via drill 0.3)
  other vias: 50.55,42.93 44.07,35.31 33.66,50.55 39.75,47.12 43.18,51.82 48.01,51.82 51.82,38.48
  pour Bottom (isolate 0.305): 58.17,58.17 58.17,32.77 32.77,32.77 32.77,58.17
  pour Top (isolate 0.305): 58.17,58.17 58.17,32.77 32.77,32.77 32.77,58.17
GND5  (via drill 0.3)
  other vias: 76.45,42.93 69.98,35.31 59.56,50.55 65.66,47.12 69.09,51.82 73.91,51.82 77.72,38.48
  pour Bottom (isolate 0.305): 84.07,58.17 84.07,32.77 58.67,32.77 58.67,58.17
  pour Top (isolate 0.305): 84.07,58.17 84.07,32.77 58.67,32.77 58.67,58.17
GND6  (via drill 0.3)
  other vias: 24.64,68.83 18.16,61.21 7.75,76.45 13.84,73.03 17.27,77.72 22.1,77.72 25.91,64.39
  pour Bottom (isolate 0.305): 32.26,84.07 32.26,58.67 6.86,58.67 6.86,84.07
  pour Top (isolate 0.305): 32.26,84.07 32.26,58.67 6.86,58.67 6.86,84.07
GND7  (via drill 0.3)
  other vias: 50.55,68.83 44.07,61.21 33.66,76.45 39.75,73.03 43.18,77.72 48.01,77.72 51.82,64.39
  pour Bottom (isolate 0.305): 58.17,84.07 58.17,58.67 32.77,58.67 32.77,84.07
  pour Top (isolate 0.305): 58.17,84.07 58.17,58.67 32.77,58.67 32.77,84.07
GND8  (via drill 0.3)
  other vias: 76.45,68.83 69.98,61.21 59.56,76.45 65.66,73.03 69.09,77.72 73.91,77.72 77.72,64.39
  pour Bottom (isolate 0.305): 84.07,84.07 84.07,58.67 58.67,58.67 58.67,84.07
  pour Top (isolate 0.305): 84.07,84.07 84.07,58.67 58.67,58.67 58.67,84.07
MISO/1  (via drill 0.3)
  Top 0.152: 41.02,11.18 U1.8 | J14.6 40.39,10.54 41.02,11.18 | 41.02,11.18 v41.91,11.18
  Bottom 0.152: J12.1 48.01,13.21 45.97,11.18 v41.91,11.18
MISO/2  (via drill 0.3)
  Top 0.152: 66.93,11.18 U2.8 | J21.6 66.29,10.54 66.93,11.18 | 66.93,11.18 v67.82,11.18
  Bottom 0.152: J19.1 73.91,13.21 71.88,11.18 v67.82,11.18
MISO/3  (via drill 0.3)
  Top 0.152: 15.11,37.08 U4.8 | J28.6 14.48,36.45 15.11,37.08 | 15.11,37.08 v16,37.08
  Bottom 0.152: J26.1 22.1,39.12 20.07,37.08 v16,37.08
MISO/4  (via drill 0.3)
  Top 0.152: 41.02,37.08 U5.8 | J35.6 40.39,36.45 41.02,37.08 | 41.02,37.08 v41.91,37.08
  Bottom 0.152: J33.1 48.01,39.12 45.97,37.08 v41.91,37.08
MISO/5  (via drill 0.3)
  Top 0.152: 66.93,37.08 U6.8 | J42.6 66.29,36.45 66.93,37.08 | 66.93,37.08 v67.82,37.08
  Bottom 0.152: J40.1 73.91,39.12 71.88,37.08 v67.82,37.08
MISO/6  (via drill 0.3)
  Top 0.152: 15.11,11.18 U3.8 | J8.6 14.48,10.54 15.11,11.18 | 15.11,11.18 v16,11.18
  Bottom 0.152: J6.1 22.1,13.21 20.07,11.18 v16,11.18
MISO/7  (via drill 0.3)
  Top 0.152: 15.11,62.99 U7.8 | J49.6 14.48,62.36 15.11,62.99 | 15.11,62.99 v16,62.99
  Bottom 0.152: J47.1 22.1,65.02 20.07,62.99 v16,62.99
MISO/8  (via drill 0.3)
  Top 0.152: 41.02,62.99 U8.8 | J56.6 40.39,62.36 41.02,62.99 | 41.02,62.99 v41.91,62.99
  Bottom 0.152: J54.1 48.01,65.02 45.97,62.99 v41.91,62.99
MISO/9  (via drill 0.3)
  Top 0.152: 66.93,62.99 U9.8 | J63.6 66.29,62.36 66.93,62.99 | 66.93,62.99 v67.82,62.99
  Bottom 0.152: J61.1 73.91,65.02 71.88,62.99 v67.82,62.99
N$1
  Top 0.152: R6.1 29.3,13.23 D1.A
N$2
  Top 0.152: R2.2 8.98,13.21 SJ5.3
N$3
  Top 0.152: R3.2 12.36,13.21 SJ5.1
N$4
  Top 0.152: R5.1 55.21,13.23 D2.A
N$5
  Top 0.152: R7.2 34.89,13.21 SJ1.3
N$6
  Top 0.152: R8.2 38.27,13.21 SJ1.1
N$7
  Top 0.152: R10.1 81.11,13.23 D3.A
N$8
  Top 0.152: R11.2 60.79,13.21 SJ2.3
N$9
  Top 0.152: R12.2 64.17,13.21 SJ2.1
N$10
  Top 0.152: R14.1 29.3,39.14 D4.A
N$11
  Top 0.152: R15.2 8.98,39.12 SJ3.3
N$12
  Top 0.152: R16.2 12.36,39.12 SJ3.1
N$13
  Top 0.152: R18.1 55.21,39.14 D5.A
N$14
  Top 0.152: R19.2 34.89,39.12 SJ4.3
N$15
  Top 0.152: R20.2 38.27,39.12 SJ4.1
N$16
  Top 0.152: R22.1 81.11,39.14 D6.A
N$17
  Top 0.152: R23.2 60.79,39.12 SJ6.3
N$18
  Top 0.152: R24.2 64.17,39.12 SJ6.1
N$19
  Top 0.152: R26.1 29.3,65.05 D7.A
N$20
  Top 0.152: R27.2 8.98,65.02 SJ7.3
N$21
  Top 0.152: R28.2 12.36,65.02 SJ7.1
N$22
  Top 0.152: R30.1 55.21,65.05 D8.A
N$23
  Top 0.152: R31.2 34.89,65.02 SJ8.3
N$24
  Top 0.152: R32.2 38.27,65.02 SJ8.1
N$25
  Top 0.152: R34.1 81.11,65.05 D9.A
N$26
  Top 0.152: R35.2 60.79,65.02 SJ9.3
N$27
  Top 0.152: R36.2 64.17,65.02 SJ9.1
SCL
  Top 0.152: J4.4 13.21,18.06 | 13.21,18.06 16.38,18.06 | 16.38,18.06 17.76,18.06 18.29,17.53 18.29,15.75 J6.3 | J3.4 25.32,23.95 25.32,21.92 26.19,21.06 J2.4 | U3.9 16.38,18.06 | R3.1 13.21,18.06
  Bottom 0.152: J6.3 19.56,18.8 20.32,19.56 20.32,21.34 19.56,22.1 19.56,29.72 J3.4
SCL1
  Top 0.152: J10.4 39.12,18.06 | 39.12,18.06 42.29,18.06 | 42.29,18.06 43.66,18.06 44.2,17.53 44.2,15.75 J12.3 | J9.4 51.23,23.95 51.23,21.92 52.09,21.06 J7.4 | U1.9 42.29,18.06 | R8.1 39.12,18.06
  Bottom 0.152: J12.3 45.47,18.8 46.23,19.56 46.23,21.34 45.47,22.1 45.47,29.72 J9.4
SCL2
  Top 0.152: J17.4 65.02,18.06 | 65.02,18.06 68.2,18.06 | 68.2,18.06 69.57,18.06 70.1,17.53 70.1,15.75 J19.3 | J16.4 77.14,23.95 77.14,21.92 78,21.06 J15.4 | U2.9 68.2,18.06 | R12.1 65.02,18.06
  Bottom 0.152: J19.3 71.37,18.8 72.14,19.56 72.14,21.34 71.37,22.1 71.37,29.72 J16.4
SCL3
  Top 0.152: J24.4 13.21,43.97 | 13.21,43.97 16.38,43.97 | 16.38,43.97 17.76,43.97 18.29,43.43 18.29,41.66 J26.3 | J23.4 25.32,49.86 25.32,47.83 26.19,46.97 J22.4 | U4.9 16.38,43.97 | R16.1 13.21,43.97
  Bottom 0.152: J26.3 19.56,44.7 20.32,45.47 20.32,47.24 19.56,48.01 19.56,55.63 J23.4
SCL4
  Top 0.152: J31.4 39.12,43.97 | 39.12,43.97 42.29,43.97 | 42.29,43.97 43.66,43.97 44.2,43.43 44.2,41.66 J33.3 | J30.4 51.23,49.86 51.23,47.83 52.09,46.97 J29.4 | U5.9 42.29,43.97 | R20.1 39.12,43.97
  Bottom 0.152: J33.3 45.47,44.7 46.23,45.47 46.23,47.24 45.47,48.01 45.47,55.63 J30.4
SCL5
  Top 0.152: J38.4 65.02,43.97 | 65.02,43.97 68.2,43.97 | 68.2,43.97 69.57,43.97 70.1,43.43 70.1,41.66 J40.3 | J37.4 77.14,49.86 77.14,47.83 78,46.97 J36.4 | U6.9 68.2,43.97 | R24.1 65.02,43.97
  Bottom 0.152: J40.3 71.37,44.7 72.14,45.47 72.14,47.24 71.37,48.01 71.37,55.63 J37.4
SCL6
  Top 0.152: J45.4 13.21,69.87 | 13.21,69.87 16.38,69.87 | 16.38,69.87 17.76,69.87 18.29,69.34 18.29,67.56 J47.3 | J44.4 25.32,75.77 25.32,73.74 26.19,72.87 J43.4 | U7.9 16.38,69.87 | R28.1 13.21,69.87
  Bottom 0.152: J47.3 19.56,70.61 20.32,71.37 20.32,73.15 19.56,73.91 19.56,81.53 J44.4
SCL7
  Top 0.152: J52.4 39.12,69.87 | 39.12,69.87 42.29,69.87 | 42.29,69.87 43.66,69.87 44.2,69.34 44.2,67.56 J54.3 | J51.4 51.23,75.77 51.23,73.74 52.09,72.87 J50.4 | U8.9 42.29,69.87 | R32.1 39.12,69.87
  Bottom 0.152: J54.3 45.47,70.61 46.23,71.37 46.23,73.15 45.47,73.91 45.47,81.53 J51.4
SCL8
  Top 0.152: J59.4 65.02,69.87 | 65.02,69.87 68.2,69.87 | 68.2,69.87 69.57,69.87 70.1,69.34 70.1,67.56 J61.3 | J58.4 77.14,75.77 77.14,73.74 78,72.87 J57.4 | U9.9 68.2,69.87 | R36.1 65.02,69.87
  Bottom 0.152: J61.3 71.37,70.61 72.14,71.37 72.14,73.15 71.37,73.91 71.37,81.53 J58.4
SDA  (via drill 0.3)
  Top 0.152: 10.67,19.05 J4.3 20.06,19.06 v20.83,18.29 | J2.3 29.22,20.06 v29.72,19.56 | 10.67,19.05 10.67,22.1 11.94,23.37 14.99,23.37 15.11,23.24 U3.7 | 10.67,19.05 10.67,18.29 10.67,17.78 10.67,16.6 R2.1
  Bottom 0.152: J6.4 20.83,13.21 v20.83,18.29 | v20.83,18.29 28.45,18.29 v29.72,19.56 | J3.3 v20.83,18.29
SDA1  (via drill 0.3)
  Top 0.152: 36.58,19.05 J10.3 45.97,19.06 v46.74,18.29 | J7.3 55.13,20.06 v55.63,19.56 | 36.58,19.05 36.58,22.1 37.85,23.37 40.89,23.37 41.02,23.24 U1.7 | 36.58,19.05 36.58,18.29 36.58,17.78 36.58,16.6 R7.1
  Bottom 0.152: J12.4 46.74,13.21 v46.74,18.29 | v46.74,18.29 54.36,18.29 v55.63,19.56 | J9.3 v46.74,18.29
SDA2  (via drill 0.3)
  Top 0.152: 62.48,19.05 63.75,19.05 J17.3 71.87,19.06 v72.64,18.29 | J15.3 81.03,20.06 v81.53,19.56 | 62.48,19.05 62.48,22.1 63.75,23.37 66.8,23.37 66.93,23.24 U2.7 | 62.48,19.05 62.48,18.29 62.48,17.78 62.48,16.6 R11.1
  Bottom 0.152: J19.4 72.64,13.21 v72.64,18.29 | v72.64,18.29 80.26,18.29 v81.53,19.56 | J16.3 v72.64,18.29
SDA3  (via drill 0.3)
  Top 0.152: 10.67,44.96 J24.3 20.06,44.97 v20.83,44.2 | J22.3 29.22,45.97 v29.72,45.47 | 10.67,44.96 10.67,48.01 11.94,49.28 14.99,49.28 15.11,49.15 U4.7 | 10.67,44.96 10.67,44.2 10.67,43.69 10.67,42.51 R15.1
  Bottom 0.152: J26.4 20.83,39.12 v20.83,44.2 | v20.83,44.2 28.45,44.2 v29.72,45.47 | J23.3 v20.83,44.2
SDA4  (via drill 0.3)
  Top 0.152: 36.58,44.96 J31.3 45.97,44.97 v46.74,44.2 | J29.3 55.13,45.97 v55.63,45.47 | 36.58,44.96 36.58,48.01 37.85,49.28 40.89,49.28 41.02,49.15 U5.7 | 36.58,44.96 36.58,44.2 36.58,43.69 36.58,42.51 R19.1
  Bottom 0.152: J33.4 46.74,39.12 v46.74,44.2 | v46.74,44.2 54.36,44.2 v55.63,45.47 | J30.3 v46.74,44.2
SDA5  (via drill 0.3)
  Top 0.152: 62.48,44.96 63.75,44.96 J38.3 71.87,44.97 v72.64,44.2 | J36.3 81.03,45.97 v81.53,45.47 | 62.48,44.96 62.48,48.01 63.75,49.28 66.8,49.28 66.93,49.15 U6.7 | 62.48,44.96 62.48,44.2 62.48,43.69 62.48,42.51 R23.1
  Bottom 0.152: J40.4 72.64,39.12 v72.64,44.2 | v72.64,44.2 80.26,44.2 v81.53,45.47 | J37.3 v72.64,44.2
SDA6  (via drill 0.3)
  Top 0.152: 10.67,70.87 11.93,70.87 J45.3 20.06,70.87 v20.83,70.1 | J43.3 29.22,71.87 v29.72,71.37 | 10.67,70.87 10.67,73.91 11.94,75.18 14.99,75.18 15.11,75.06 U7.7 | 10.67,70.87 10.67,70.1 10.67,69.6 10.67,68.41 R27.1
  Bottom 0.152: J47.4 20.83,65.02 v20.83,70.1 | v20.83,70.1 28.45,70.1 v29.72,71.37 | J44.3 v20.83,70.1
SDA7  (via drill 0.3)
  Top 0.152: 36.58,70.87 37.84,70.87 J52.3 45.97,70.87 v46.74,70.1 | J50.3 55.13,71.87 v55.63,71.37 | 36.58,70.87 36.58,73.91 37.85,75.18 40.89,75.18 41.02,75.06 U8.7 | 36.58,70.87 36.58,70.1 36.58,69.6 36.58,68.41 R31.1
  Bottom 0.152: J54.4 46.74,65.02 v46.74,70.1 | v46.74,70.1 54.36,70.1 v55.63,71.37 | J51.3 v46.74,70.1
SDA8  (via drill 0.3)
  Top 0.152: 62.48,70.87 63.75,70.87 J59.3 71.87,70.87 v72.64,70.1 | J57.3 81.03,71.87 v81.53,71.37 | 62.48,70.87 62.48,73.91 63.75,75.18 66.8,75.18 66.93,75.06 U9.7 | 62.48,70.87 62.48,70.1 62.48,69.6 62.48,68.41 R35.1
  Bottom 0.152: J61.4 72.64,65.02 v72.64,70.1 | v72.64,70.1 80.26,70.1 v81.53,71.37 | J58.3 v72.64,70.1

## Text on the board
Top: X02 | X02 | X02 | X02 | X02 | X02 | X02 | X02 | X02
Milling: v-score | v-score | v-score | v-score | v-score | v-score | v-score | v-score